# Altium PCB PCB1.PcbDoc
Units mm, origin at the board's own origin, x right, y up, seen from the top; angles counter-clockwise.
Board outline 56.26 x 53.21 mm, 2 copper layers (Top Layer, Bottom Layer); 8 components, 17 nets, 74 pads, 0 vias.
Unrouted connection lines stored in the file: 4.
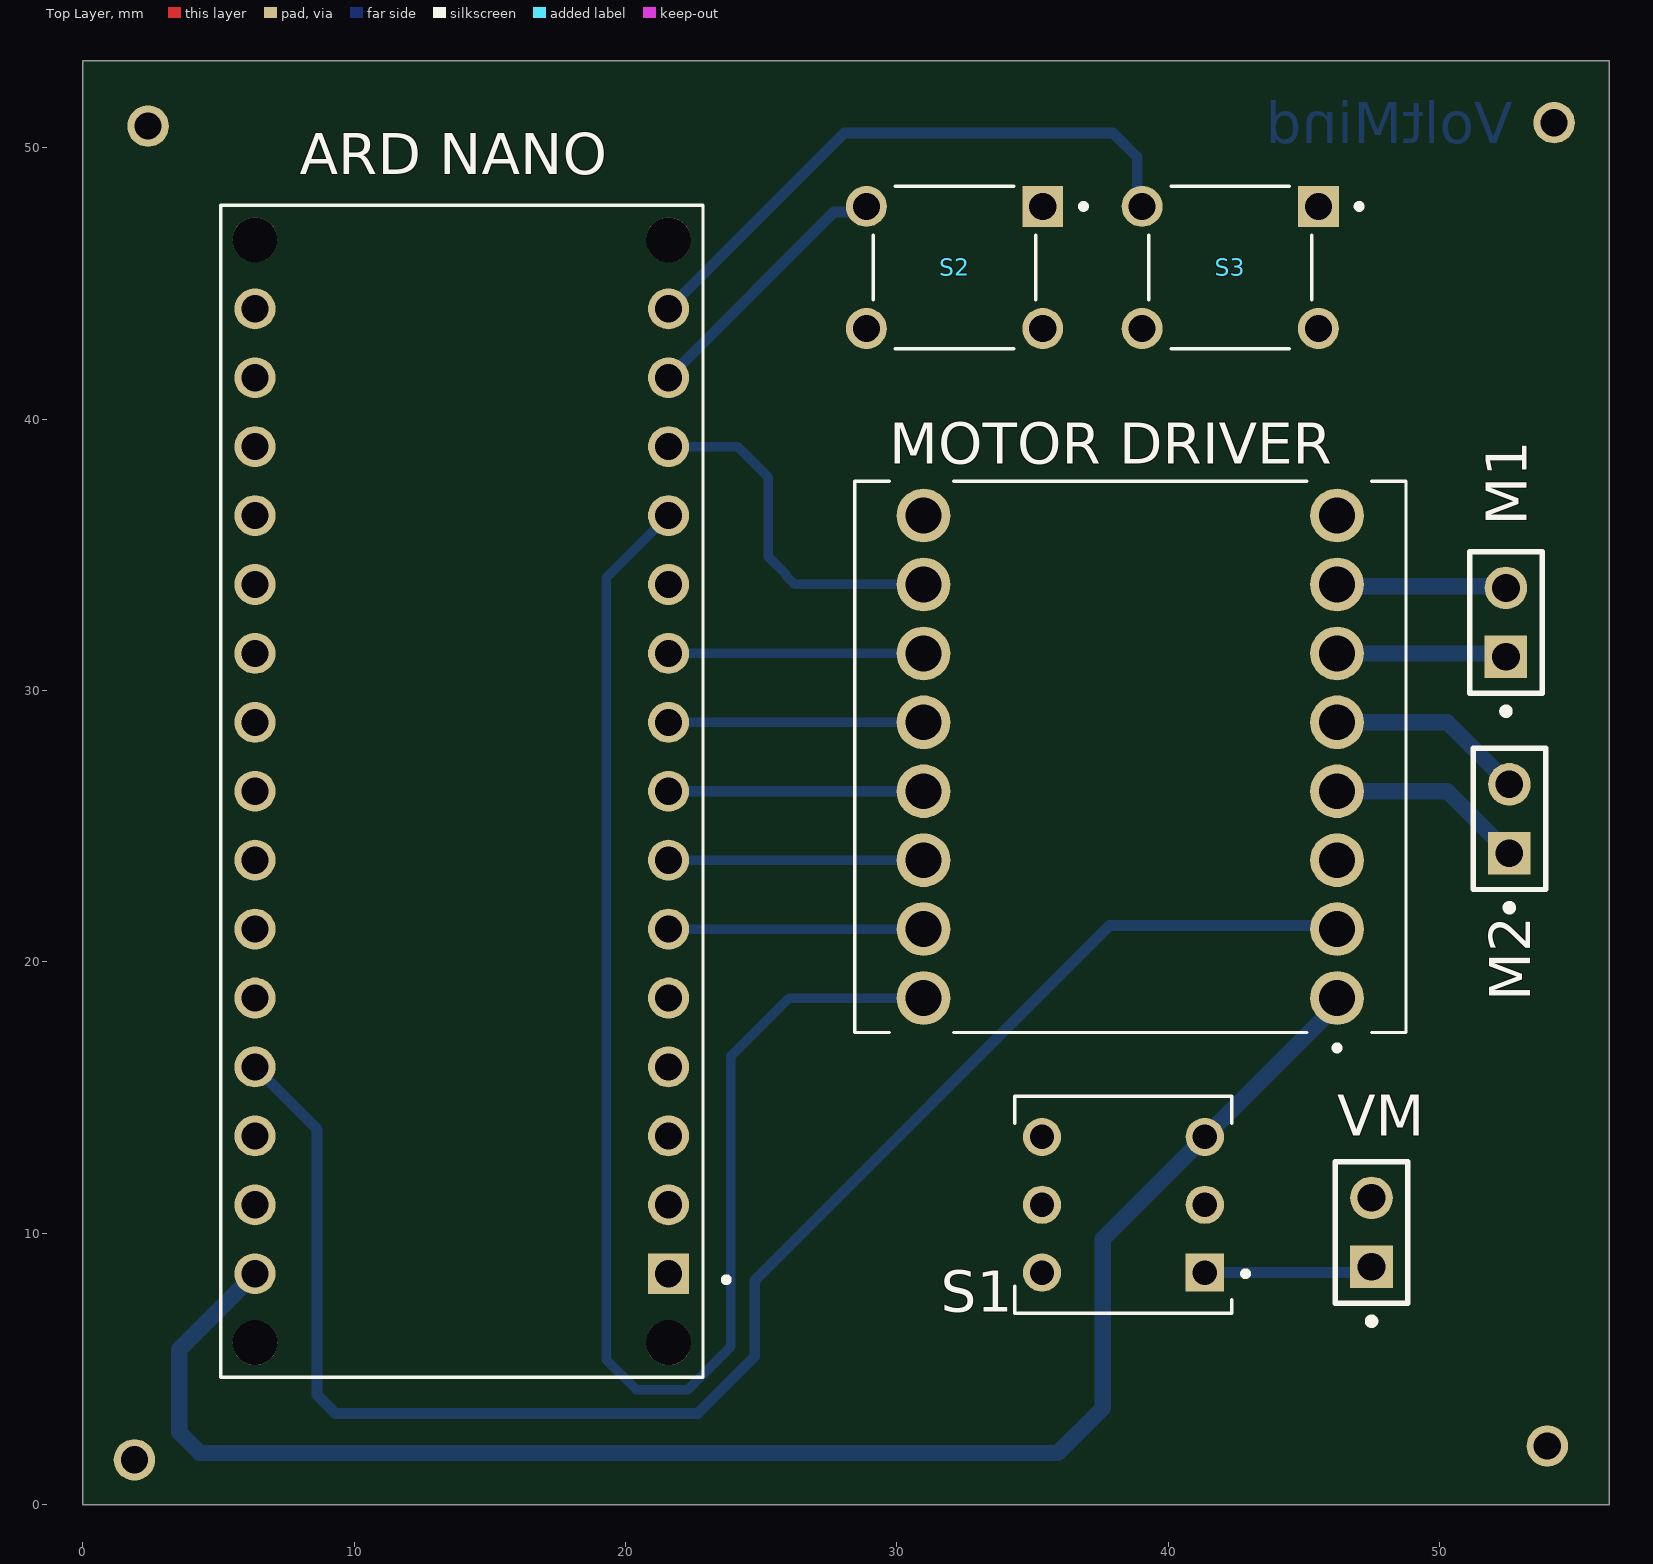
[diagram p0: Top Layer view]
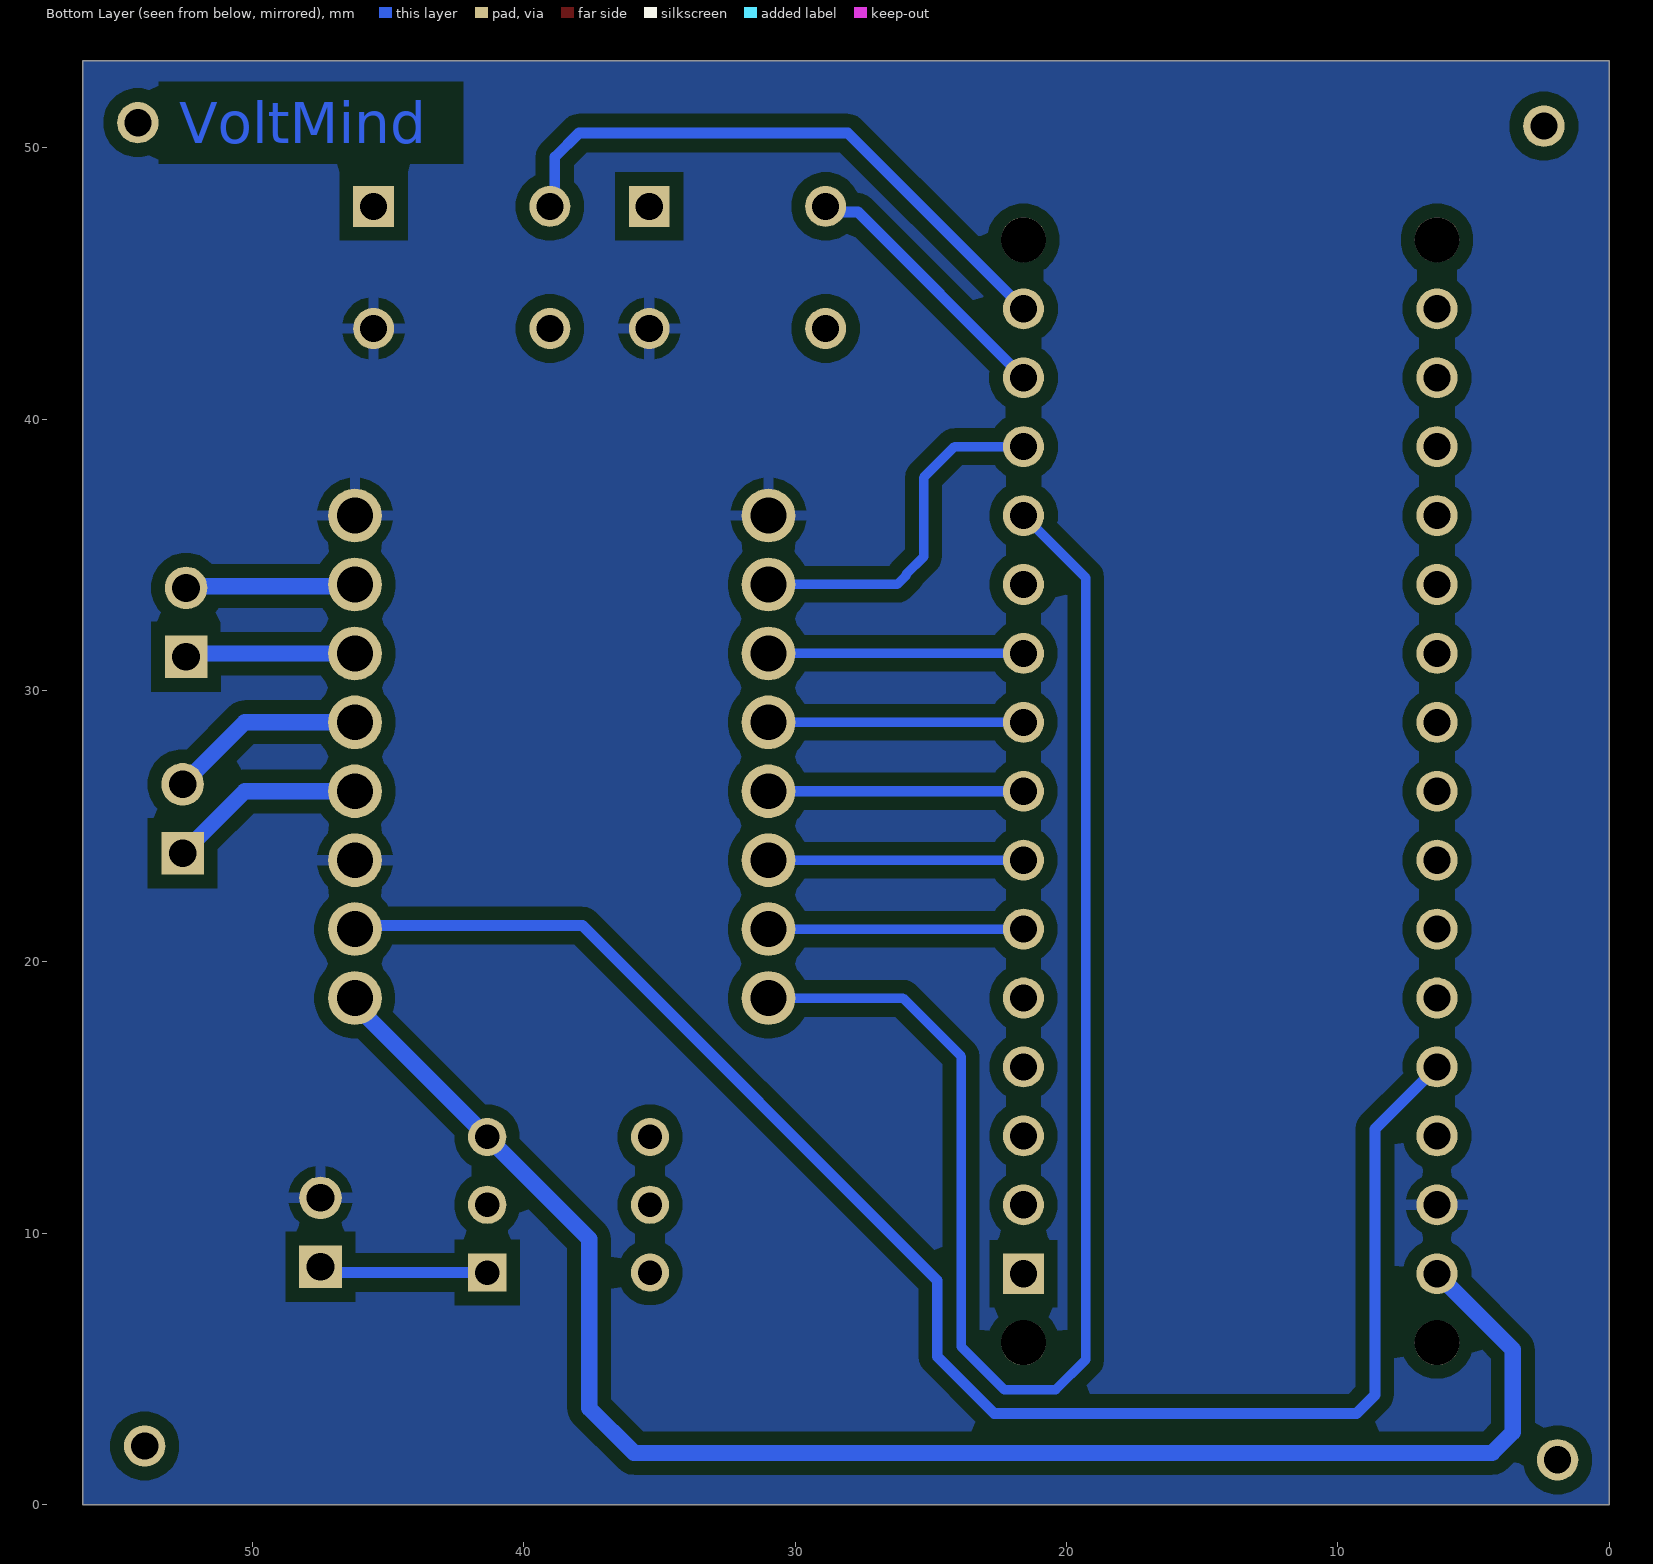
[diagram p1: Bottom Layer view, seen from below]
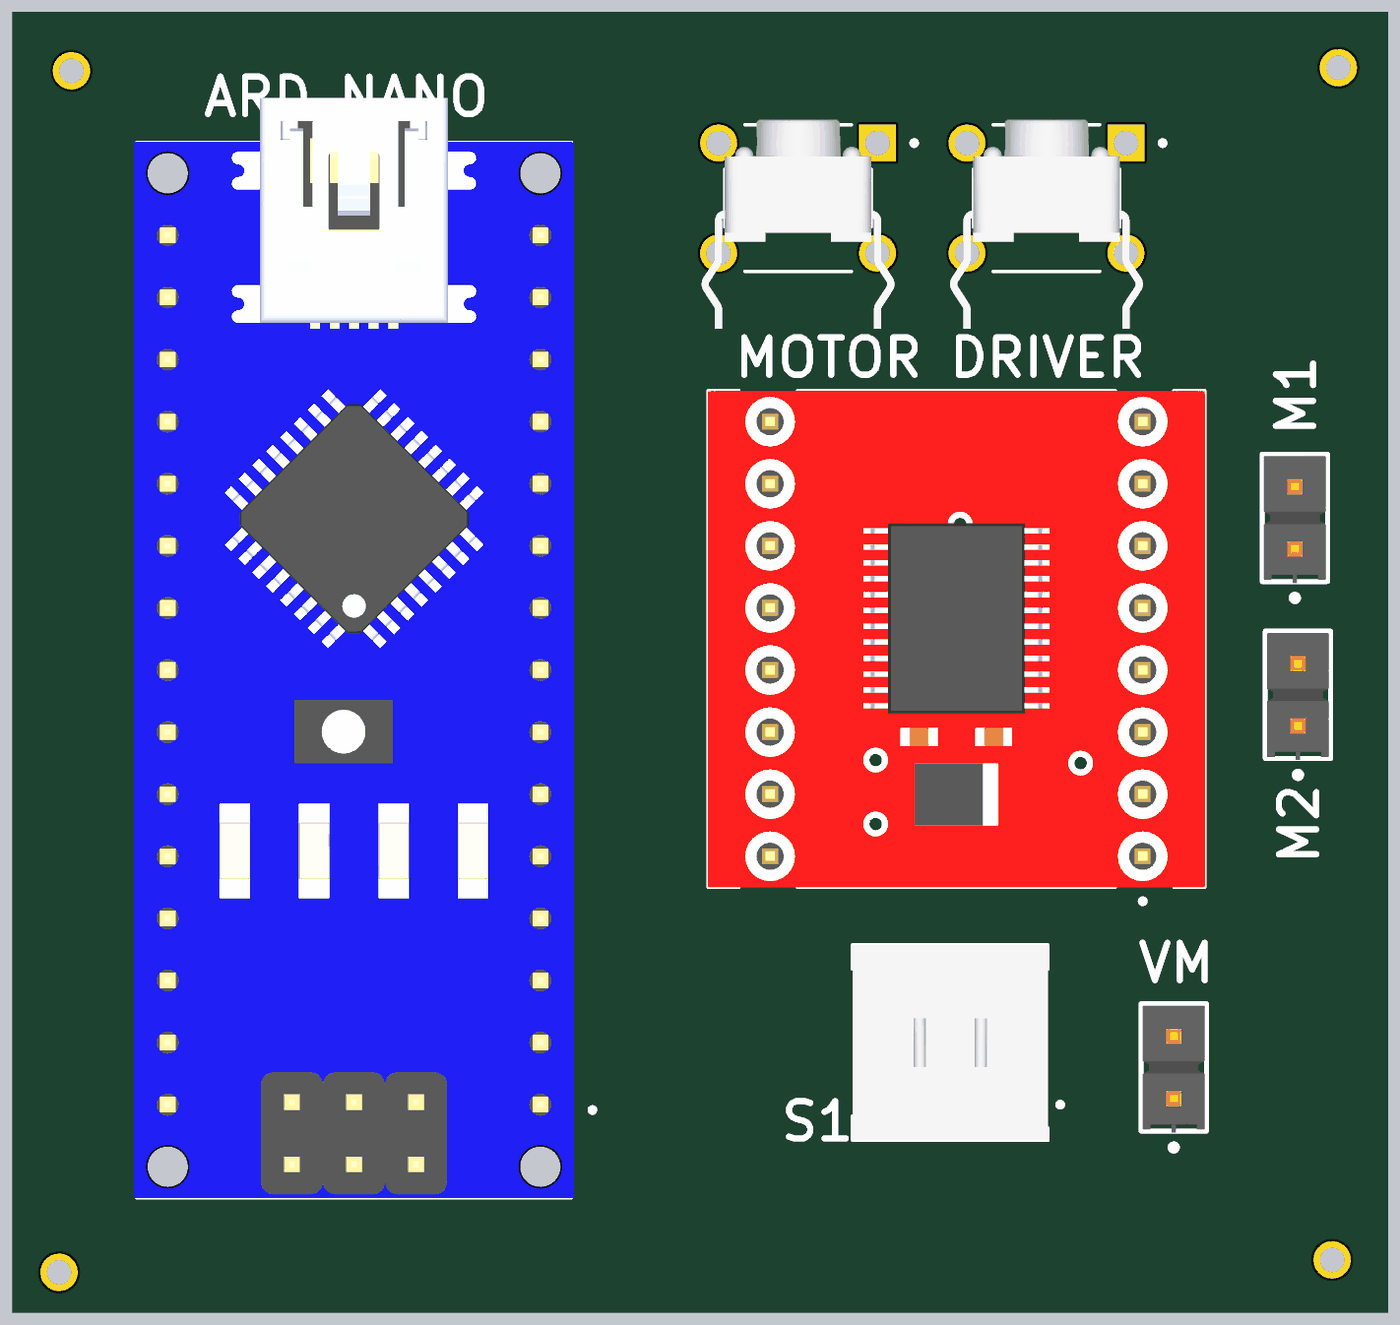
[diagram p2: 3D render of the assembled board from above, using the file's embedded part models]

## Layer stack, top to bottom
Top Solder: solder mask 0.0102, Solder Resist, Dk 3.5
Top Layer: signal copper 0.0356
Dielectric 1: dielectric 0.32, FR-4, Dk 4.8
Bottom Layer: signal copper 0.0356
Bottom Solder: solder mask 0.0102, Solder Resist, Dk 3.5

## Board outline
0,0 0,53.213 56.261,53.213 56.261,0

## Design rules (kind name [scope] priority, off if disabled: settings)
Clearance [All] p1: gap=0.5 ignorepadtopadclearanceinfootprint=FALSE
PolygonConnect [All] p1: connectstyle=Relief reliefconductorwidth=0.4 reliefentries=4 polygonreliefangle="90 Angle" airgapwidth=0.4
RoutingVias [All] p1: holewidth=0.111 width=1.27 viastyle="Through Hole" minholewidth=0.711 minwidth=0.27 maxholewidth=0.111 maxwidth=1.27
SilkToSilkClearance [All] p1: silktosilkclearance=0
SilkToSolderMaskClearance [IsPad] p1: minsilkscreentomaskgap=0 clearancetoexposedcopper=TRUE
SolderMaskExpansion [All] p1: expansion=0.102 istentingtop=FALSE
SupplyNets "Schematic Supply Nets_1" [InNet('VCC')] p1: voltage=0.000
SupplyNets "Schematic Supply Nets" [InNet('GND')] p2: voltage=0.000
Width [All] p1: maxlimit=0.8 minlimit=0.35 preferedwidth=0.4
28 further rules are at their usual default settings.

## Components (designator, comment, footprint, x,y, rotation, side; value= is the part's Value field where it differs from the comment)
"ARD NANO" "A000005" MODULE_A000005 13.97,26.289 r180 top
M1 "TSW-102-12-T-S" FP-TSW-102-12-T-S-MFG 52.451,32.512 r90 top (schematic designator "MOTOR 1")
M2 "TSW-102-12-T-S" FP-TSW-102-12-T-S-MFG 52.578,25.273 r90 top (schematic designator "MOTOR 2")
"MOTOR DRIVER" "" MODULE_ROB-14450 38.608,27.559 r180 top
S1 "TL2285OA" SW_TL2285OA 38.354,11.049 r90 top
S2 "TL1105AF160Q" SW_TL1105AF160Q 32.131,45.593 r180 top
S3 "TL1105AF160Q" SW_TL1105AF160Q 42.291,45.593 r180 top
VM "TSW-102-12-T-S" FP-TSW-102-12-T-S-MFG 47.498,10.033 r90 top

## Footprints (in the part's own frame and the unit in brackets; to place one, negate y for a bottom-side part, rotate by r counter-clockwise, add the part's x,y. Pads: shape width x height; smd on the part's side, far side on the other; paste and mask are expansions set on the pad)
FP-TSW-102-12-T-S-MFG [mm]
  rect 1.57x1.57 hole 1.02 paste-2539.97 mask+0: 1(-1.27,0)
  round 1.57 hole 1.02 paste-2539.97 mask+0: 2(1.27,0)
  silkscreen extent -3.4,-1.34 2.61,1.34, body extent -2.71,-1.44 2.71,1.44, height 0.25
MODULE_A000005 [mm]
  rect 1.508x1.508 / inner round 1.508 / far side rect 1.508x1.508 hole 1: 1(-7.62,17.78)
  round 1.508 hole 1: 2(-7.62,15.24) 3(-7.62,12.7) 4(-7.62,10.16) 5(-7.62,7.62) 6(-7.62,5.08) 7(-7.62,2.54) 8(-7.62,0) 9(-7.62,-2.54) 10(-7.62,-5.08) 11(-7.62,-7.62) 12(-7.62,-10.16) 13(-7.62,-12.7) 14(-7.62,-15.24) 15(-7.62,-17.78) 16(7.62,-17.78) 17(7.62,-15.24) 18(7.62,-12.7) 19(7.62,-10.16) 20(7.62,-7.62) 21(7.62,-5.08) 22(7.62,-2.54) 23(7.62,0) 24(7.62,2.54) 25(7.62,5.08) 26(7.62,7.62) 27(7.62,10.16) 28(7.62,12.7) 29(7.62,15.24) 30(7.62,17.78)
  round 1.651 hole 1.651 unplated: ""(-7.62,20.32) ""(-7.62,-20.32) ""(7.62,20.32) ""(7.62,-20.32)
  silkscreen extent -9.85,-21.59 8.89,21.59, body extent -9,-23.4 9,21.6, height 12.6
MODULE_ROB-14450 [mm]
  round 1.98 hole 1.32: 1(-7.62,8.89) 2(-7.62,6.35) 3(-7.62,3.81) 4(-7.62,1.27) 5(-7.62,-1.27) 6(-7.62,-3.81) 7(-7.62,-6.35) 8(-7.62,-8.89) 9(7.62,-8.89) 10(7.62,-6.35) 11(7.62,-3.81) 12(7.62,-1.27) 13(7.62,1.27) 14(7.62,3.81) 15(7.62,6.35) 16(7.62,8.89)
  silkscreen extent -10.16,-10.16 10.16,10.83, body extent -10.16,-10.16 10.16,10.16, height 5.5
SW_TL1105AF160Q [mm]
  rect 1.508x1.508 / inner round 1.508 / far side rect 1.508x1.508 hole 1 mask+0.102: 1(-3.25,-2.25)
  round 1.508 hole 1 mask+0.102: 2(3.25,-2.25) 3(-3.25,2.25) 4(3.25,2.25)
  silkscreen extent -4.85,-3 3,3, body extent -3.95,-3.21 3.95,5.34, height 3
SW_TL2285OA [mm]
  rect 1.408x1.408 / inner round 1.408 / far side rect 1.408x1.408 hole 0.9: 1(-2.5,-3)
  round 1.408 hole 0.9: 2(0,-3) 3(2.5,-3) 4(-2.5,3) 5(0,3) 6(2.5,3)
  silkscreen extent -4,-4.6 4,4, body extent -4,-4 4,4, height 13.5

## Part data
"ARD NANO": "Arduino Nano Mikrodenetleyici KartÄ±, ATmega328", Package="Non-Standard Arduino", Check_prices=https://www.snapeda.com/parts/A000005/Arduino/view-part/?ref=eda, MF=Arduino, MP=A000005, SnapEDA_Link=https://www.snapeda.com/parts/A000005/Arduino/view-part/?ref=snap
M1 M2 VM: library part CMP-02766-001444-1, "CONN HEADER VERT 2POS 2.54MM", Contact Material=Bronze, Contact Plating=Tin, Gender=Male, Mount="Through Hole", Number of Contacts=2, Number of Rows=1, Packaging=Bulk, Pitch=2.54mm, Radiation Hardening=No, REACH SVHC="No SVHC", RoHS Compliant=Yes, Termination=Solder
"MOTOR DRIVER": library part ROB-14450, "TB6612FNG Motor Controller/Driver Power Management Evaluation Board", Package=None, Availability="In Stock", Check_prices=https://www.snapeda.com/parts/ROB-14450/SparkFun%20Electronics/view-part/2656367/?ref=eda, MF="SparkFun Electronics", MP=ROB-14450, Price=None, SnapEDA_Link=https://www.snapeda.com/parts/ROB-14450/SparkFun%20Electronics/view-part/2656367/?ref=snap
S1: "Pushbutton Switch, TL2285, DPDT, ON-(ON), Plunger for Cap, 100mA, 30VDC,PC Pin", Package=None, Check_prices=https://www.snapeda.com/parts/TL2285OA/E-Switch/view-part/?ref=eda, MF=E-Switch, MP=TL2285OA, SnapEDA_Link=https://www.snapeda.com/parts/TL2285OA/E-Switch/view-part/?ref=snap
S2 S3: "Tactile Switch SPST-NO Top Actuated Through Hole", Package=None, Check_prices=https://www.snapeda.com/parts/TL1105AF160Q/E-Switch/view-part/?ref=eda, MF=E-Switch, MP=TL1105AF160Q, SnapEDA_Link=https://www.snapeda.com/parts/TL1105AF160Q/E-Switch/view-part/?ref=snap

## Free pads (board coordinates)
  round 1.524 hole 1: 10(2.413,50.8) 11(53.975,2.159) 12(54.229,50.927) 13(1.905,1.651)

## Nets (pads, with @x,y where several pads share a name; then routed paths per layer and width w, separated by ;. In a path a pad name is that pad's centre, name@x,y a point inside that pad or via, vN(x,y) a via of type N, cw(c..) or ccw(c..) an arc to the next point about the centre after c; other vN are vias at no path point)
GND: "ARD NANO.29" "MOTOR DRIVER.3" "MOTOR DRIVER.8" "MOTOR DRIVER.9" S2.3 S3.3 VM.2
"NetARD NANO_6": "ARD NANO.6" "MOTOR DRIVER.15" | length 9.4
  Bottom Layer w0.35: 21.59,21.209 30.988,21.209
"NetARD NANO_7": "ARD NANO.7" "MOTOR DRIVER.14" | length 9.4
  Bottom Layer w0.35: 21.59,23.749 30.988,23.749
"NetARD NANO_8": "ARD NANO.8" "MOTOR DRIVER.13" | length 9.4
  Bottom Layer w0.4: 21.59,26.289 30.988,26.289
"NetARD NANO_9": "ARD NANO.9" "MOTOR DRIVER.12" | length 9.4
  Bottom Layer w0.35: 21.59,28.829 30.988,28.829
"NetARD NANO_10": "ARD NANO.10" "MOTOR DRIVER.11" | length 9.4
  Bottom Layer w0.35: 21.59,31.369 30.988,31.369
"NetARD NANO_12": "ARD NANO.12" "MOTOR DRIVER.16" | length 56.4
  Bottom Layer w0.35: 21.59,36.449 19.304,34.163 19.304,5.334 20.402,4.236 22.303,4.236 23.876,5.809 23.876,16.51 26.035,18.669 30.988,18.669
"NetARD NANO_13": "ARD NANO.13" "MOTOR DRIVER.10" | length 13.2
  Bottom Layer w0.35: 21.59,38.989 24.13,38.989 25.273,37.846 25.273,34.925 25.908,34.29 25.908,34.241 26.24,33.909 30.988,33.909
"NetARD NANO_14": "ARD NANO.14" S2.2 | length 9.9
  Bottom Layer w0.4: 21.59,41.529 27.692,47.631 28.669,47.631 S2.2
"NetARD NANO_15": "ARD NANO.15" S3.2 | length 22.2
  Bottom Layer w0.4: 21.59,44.069 28.067,50.546 37.973,50.546 38.862,49.657 38.862,48.022 S3.2
"NetARD NANO_27": "ARD NANO.27" "MOTOR DRIVER.2" | length 60
  Bottom Layer w0.4: 6.35,16.129 8.636,13.843 8.636,4.044 9.319,3.361 22.665,3.361 24.765,5.461 24.765,8.255 37.846,21.336 39.751,21.336 46.101,21.336 46.228,21.209
"NetMOTOR 1_1": "MOTOR DRIVER.6" M1.1 | length 6.3
  Bottom Layer w0.4: M1.1@52.324,31.369 M1.1
  Bottom Layer w0.6: 46.228,31.369 M1.1@52.324,31.369
"NetMOTOR 1_2": "MOTOR DRIVER.7" M1.2 | length 6.3
  Bottom Layer w0.4: 46.228,33.909 46.291,33.846 ; M1.2@52.387,33.846 M1.2
  Bottom Layer w0.6: 46.291,33.846 M1.2@52.387,33.846
"NetMOTOR 2_1": "MOTOR DRIVER.4" M2.1 | length 7.3
  Bottom Layer w0.6: 46.228,26.289 50.292,26.289 M2.1
"NetMOTOR 2_2": "MOTOR DRIVER.5" M2.2 | length 7.3
  Bottom Layer w0.6: 46.228,28.829 50.292,28.829 M2.2
NetS1_1: S1.1 VM.1 | length 6.2
  Bottom Layer w0.4: S1.1 47.284,8.549 VM.1
VCC: "ARD NANO.30" "MOTOR DRIVER.1" S1.3 | length 60.7
  Bottom Layer w0.6: 6.35,8.509 3.556,5.715 3.556,2.667 4.318,1.905 35.941,1.905 37.592,3.556 37.592,9.787 46.228,18.423 46.228,18.669
pads on no net: "ARD NANO.1" "ARD NANO.2" "ARD NANO.3" "ARD NANO.4" "ARD NANO.5" "ARD NANO.11" "ARD NANO.16" "ARD NANO.17" "ARD NANO.18" "ARD NANO.19" "ARD NANO.20" "ARD NANO.21" "ARD NANO.22" "ARD NANO.23" "ARD NANO.24" "ARD NANO.25" "ARD NANO.26" "ARD NANO.28" "ARD NANO." S1.2 S1.4 S1.5 S1.6 S2.1 S2.4 S3.1 S3.4

## Polygon pours and split planes (outlines as drawn)
GND on Bottom Layer "GND_L02_P000" (solid, pour order 0): 0,53.213 56.261,53.213 56.261,0 0,0

## Other copper
Bottom Layer:
  text "VoltMind" at 52.705,50.165 h1.52